# Altium PCB PCB_V1_Controla.PcbDoc
Units mm, origin at the board's own origin, x right, y up, seen from the top; angles counter-clockwise.
Board outline 98 x 133 mm, 2 copper layers (L1, L2), stack 0.221 mm thick; 22 components, 26 nets, 113 pads, 0 vias.
Unrouted connection lines stored in the file: 1.
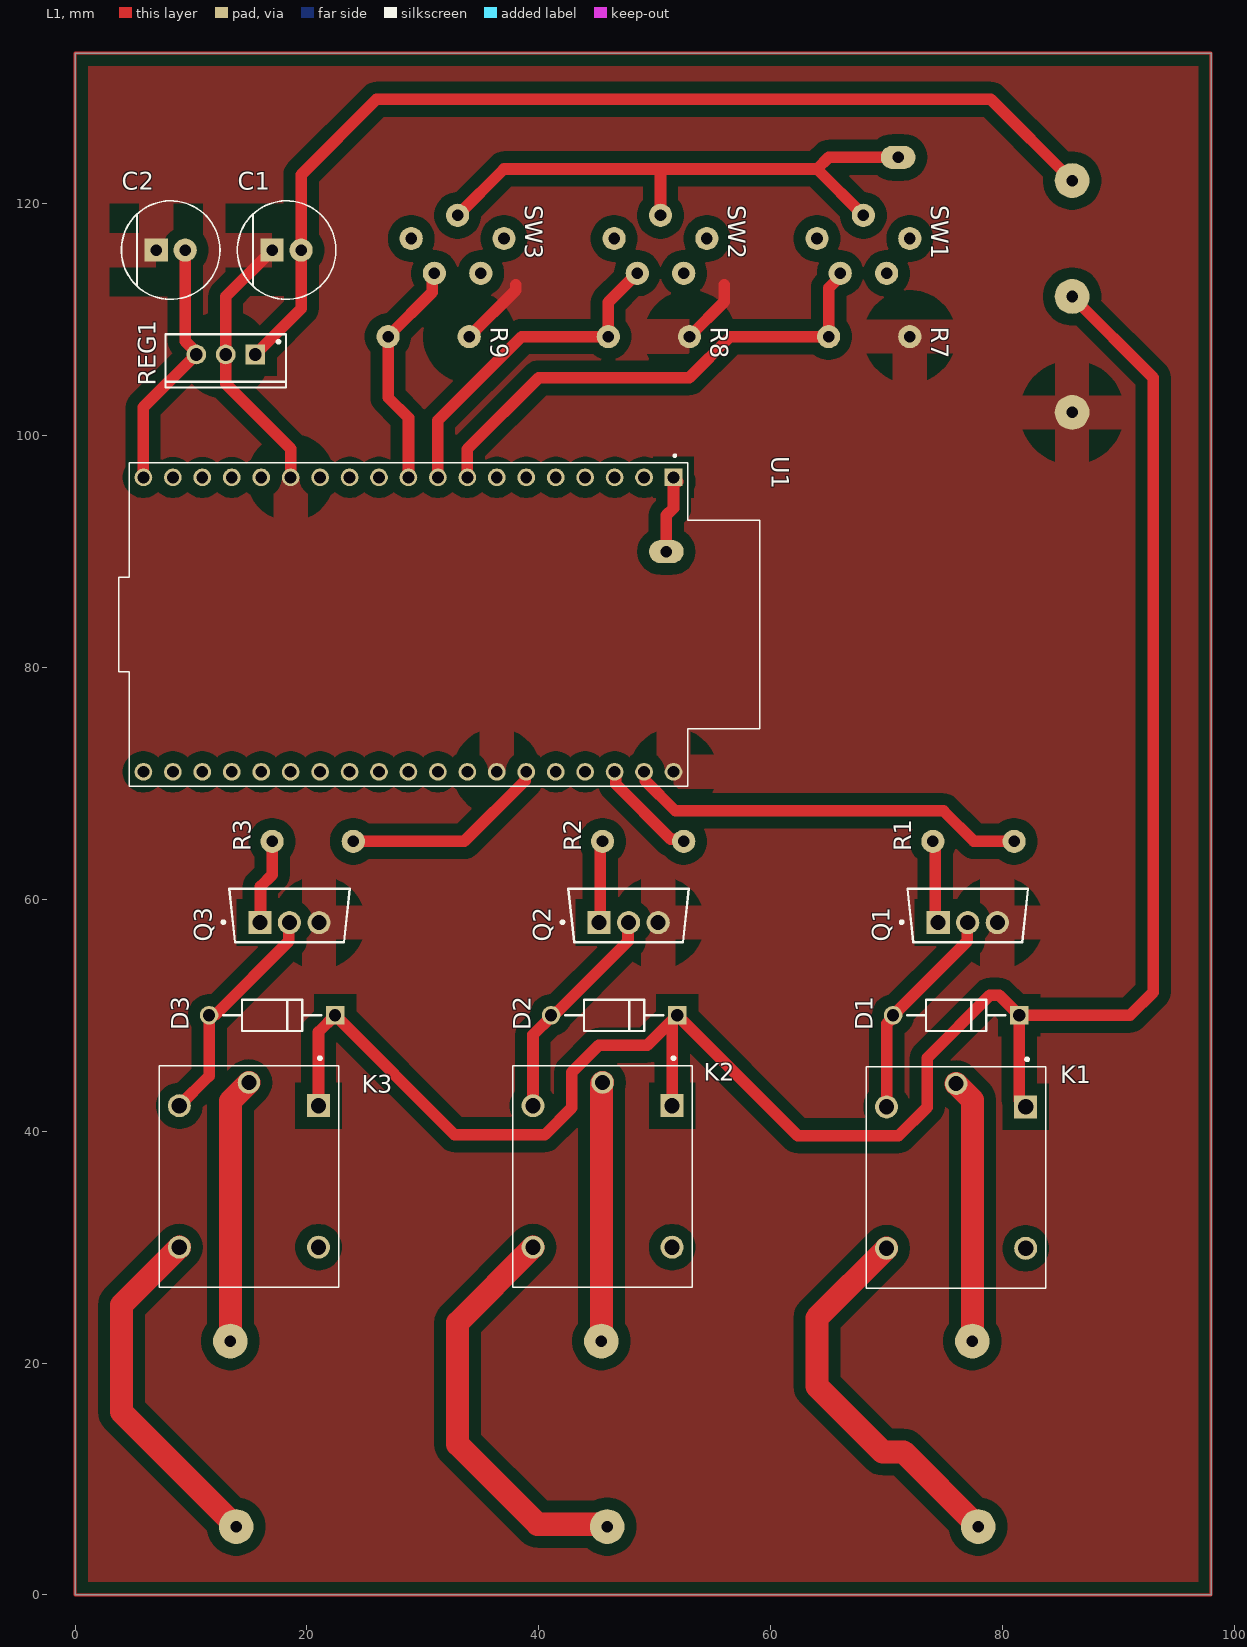
[diagram p0: L1 view]
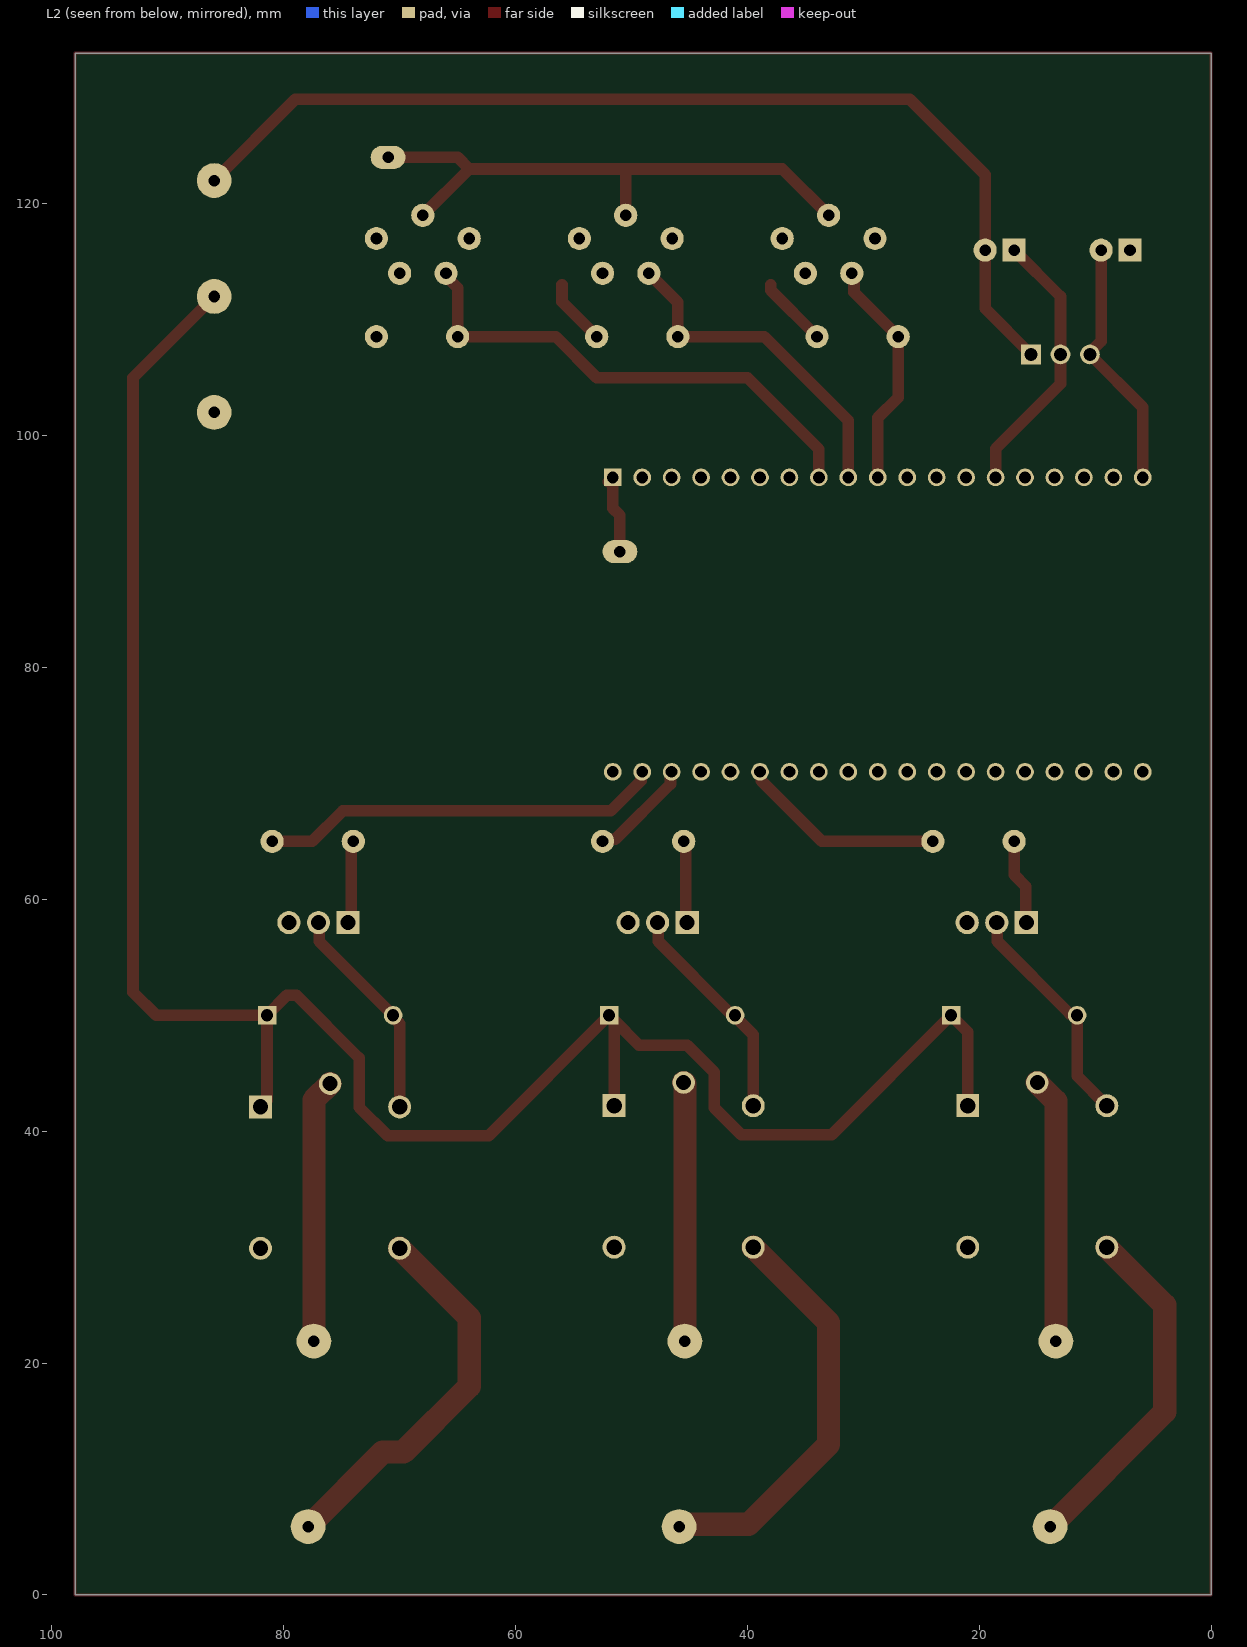
[diagram p1: L2 view, seen from below]
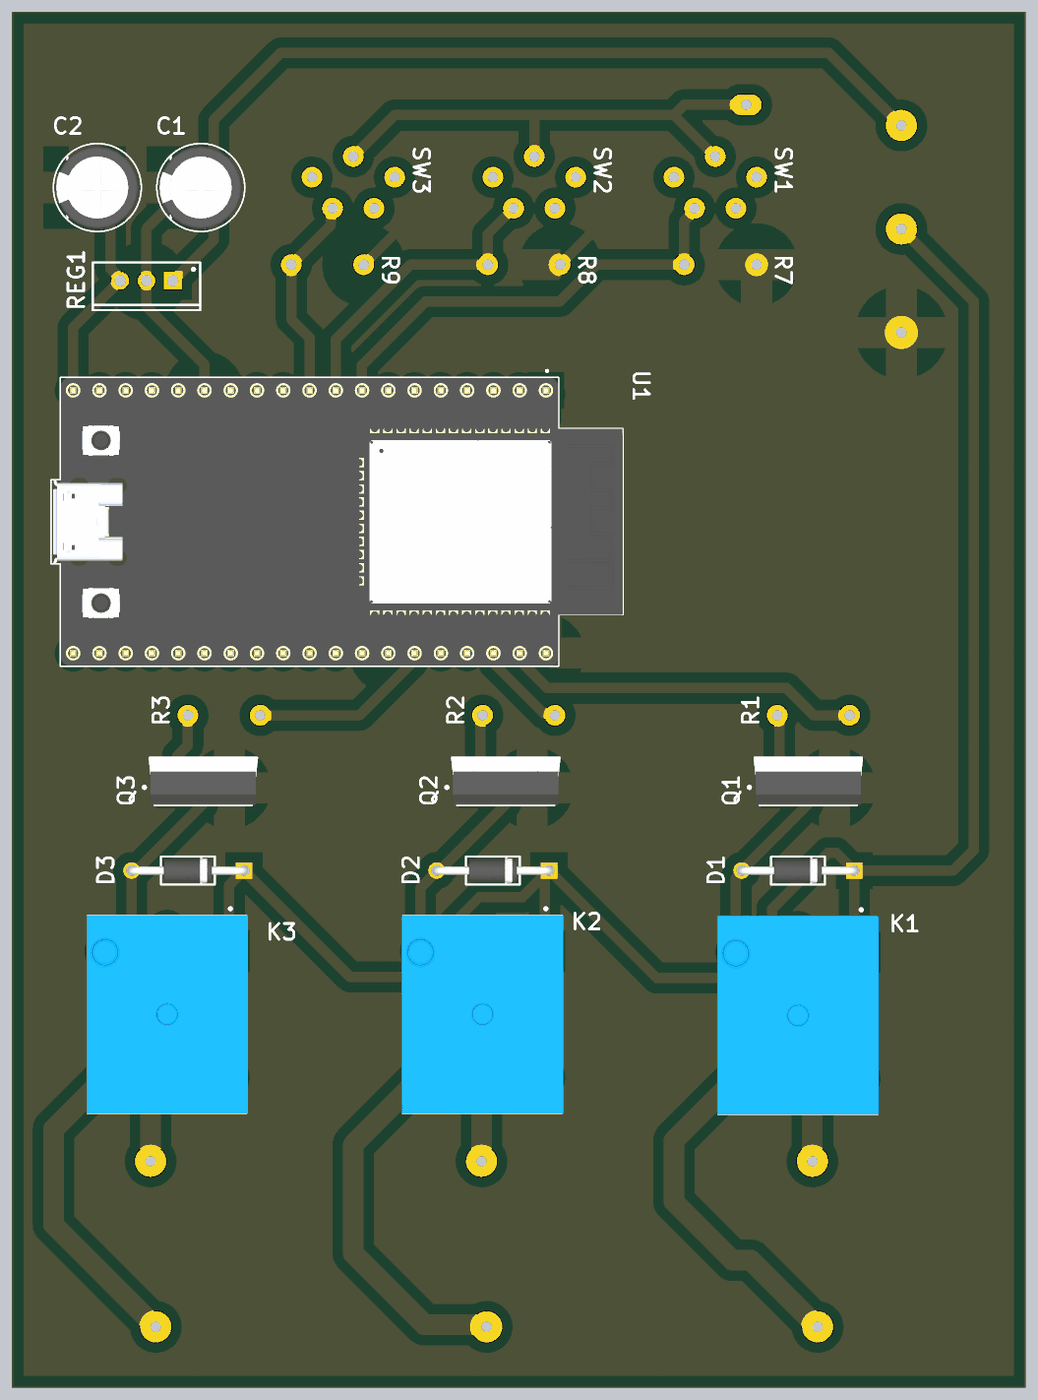
[diagram p2: 3D render of the assembled board from above, using the file's embedded part models]

## Layer stack, top to bottom
Top Solder: solder mask 0.0102, Solder Resist, Dk 3.5
L1: signal copper 0.0356
Dielectric 1: dielectric 0.15, FR-4, Dk 4.8
L2: signal copper 0.0356
Bottom Solder: solder mask 0.0102, Solder Resist, Dk 3.5

## Board outline
0,0 0,133 98,133 98,0

## Design rules (kind name [scope] priority, off if disabled: settings)
Clearance [All] p1: gap=1 ignorepadtopadclearanceinfootprint=TRUE
PolygonConnect [All] p1: connectstyle=Relief reliefconductorwidth=3 reliefentries=4 polygonreliefangle="90 Angle" airgapwidth=3
RoutingVias [All] p1: holewidth=0.711 width=1.27 viastyle="Through Hole" minholewidth=0.711 minwidth=1.27 maxholewidth=0.711 maxwidth=1.27
SolderMaskExpansion [All] p1: expansion=0.102 istentingtop=FALSE
SupplyNets "Schematic Supply Nets_2" [InNet('+12')] p1: voltage=0.000
SupplyNets "Schematic Supply Nets_1" [InNet('GND')] p2: voltage=0.000
SupplyNets "Schematic Supply Nets" [InNet('SW1')] p3: voltage=0.000
Width [All] p1: maxlimit=3 minlimit=1 preferedwidth=2
30 further rules are at their usual default settings.

## Components (designator, comment, footprint, x,y, rotation, side; value= is the part's Value field where it differs from the comment)
C1 "EEAGA1V470" FP-RAD-TH-D_8_0_5-L_7_1-F-MFG 18.25,116 r0 top
C2 "EEAGA1V470" FP-RAD-TH-D_8_0_5-L_7_1-F-MFG 8.25,116 r0 top
D1 "1N4001-E3/54" FP-1N4001-E3-54-MFG 76,50 r180 top
D2 "1N4001-E3/54" FP-1N4001-E3-54-MFG 46.5,50 r180 top
D3 "1N4001-E3/54" FP-1N4001-E3-54-MFG 17,50 r180 top
K1 "SRD-05VDC-SL-C" RELAY_SRD-05VDC-SL-C 76,36 r270 top
K2 "SRD-05VDC-SL-C" RELAY_SRD-05VDC-SL-C 45.5,36.1 r270 top
K3 "SRD-05VDC-SL-C" RELAY_SRD-05VDC-SL-C 15,36.1 r270 top
Q1 "TIP31C" FP-TO-220-P0A0015988-MFG 77,58.607 r90 top
Q2 "TIP31C" FP-TO-220-P0A0015988-MFG 47.748,58.607 r90 top
Q3 "TIP31C" FP-TO-220-P0A0015988-MFG 18.496,58.607 r90 top
R1 "General 1/4 W Resistor" "Generic 1/4W Metallic Resistor Axial" 81,65 r180 top
R2 "General 1/4 W Resistor" "Generic 1/4W Metallic Resistor Axial" 52.5,65 r180 top
R3 "General 1/4 W Resistor" "Generic 1/4W Metallic Resistor Axial" 24,65 r180 top
R7 "General 1/4 W Resistor" "Generic 1/4W Metallic Resistor Axial" 65,108.543 r0 top
R8 "General 1/4 W Resistor" "Generic 1/4W Metallic Resistor Axial" 46,108.543 r0 top
R9 "General 1/4 W Resistor" "Generic 1/4W Metallic Resistor Axial" 27,108.543 r0 top
REG1 "L7805CV" TO220 13,107 r180 top
SW1 "16mm 5 Pin Momentary Button" "16mm Pushbutton 5 Pins" 68,119 r270 top
SW2 "16mm 5 Pin Momentary Button" "16mm Pushbutton 5 Pins" 50.5,119 r270 top
SW3 "16mm 5 Pin Momentary Button" "16mm Pushbutton 5 Pins" 33,119 r270 top
U1 "ESP32-DEVKITC" MODULE_ESP32-DEVKITC 28.77,83.7 r270 top

## Footprints (in the part's own frame and the unit in brackets; to place one, negate y for a bottom-side part, rotate by r counter-clockwise, add the part's x,y. Pads: shape width x height; smd on the part's side, far side on the other; paste and mask are expansions set on the pad)
"16mm Pushbutton 5 Pins" [mm] "Momentary Button 16mm with indicator LED."
  round 2 hole 1: COM(0,0) LED(2,4) LED(2,-4) NC(5,2) NO(5,-2)
FP-1N4001-E3-54-MFG [mm]
  rect 1.6x1.6 hole 1.05 paste-2539.97 mask+0: 1(-5.438,0)
  round 1.6 hole 1.05 paste-2539.97 mask+0: 2(5.438,0)
  silkscreen extent -4.24,-1.35 4.24,1.35, body extent -6.34,-1.45 6.34,1.45, height 0.25
FP-RAD-TH-D_8_0_5-L_7_1-F-MFG [mm]
  rect 2x2 hole 1 paste-2539.97 mask+0: 1(-1.25,0)
  round 2 hole 1 paste-2539.97 mask+0: 2(1.25,0)
  silkscreen extent -4.25,-4.25 4.25,4.25, body extent -4.35,-4.35 4.35,4.35, height 0.25
FP-TO-220-P0A0015988-MFG [mm]
  rect 2x2 hole 1.3 paste-2539.97 mask+0: 1(-0.607,2.55)
  round 2 hole 1.3 paste-2539.97 mask+0: 2(-0.607,0) 3(-0.607,-2.55)
  silkscreen extent -2.3,-5.2 2.3,5.82, body extent -2.4,-5.3 2.4,5.3, height 0.25
"Generic 1/4W Metallic Resistor Axial" [mm]
  round 2 hole 1: 1(0,0) 2(7,0)
MODULE_ESP32-DEVKITC [mm]
  rect 1.53x1.53 / inner round 1.53 / far side rect 1.53x1.53 hole 1.02: 1(-12.7,22.85)
  round 1.53 hole 1.02: 2(-12.7,20.31) 3(-12.7,17.77) 4(-12.7,15.23) 5(-12.7,12.69) 6(-12.7,10.15) 7(-12.7,7.61) 8(-12.7,5.07) 9(-12.7,2.53) 10(-12.7,-0.01) 11(-12.7,-2.55) 12(-12.7,-5.09) 13(-12.7,-7.63) 14(-12.7,-10.17) 15(-12.7,-12.71) 16(-12.7,-15.25) 17(-12.7,-17.79) 18(-12.7,-20.33) 19(-12.7,-22.87) 20(12.7,-22.87) 21(12.7,-20.33) 22(12.7,-17.79) 23(12.7,-15.25) 24(12.7,-12.71) 25(12.7,-10.17) 26(12.7,-7.63) 27(12.7,-5.09) 28(12.7,-2.55) 29(12.7,-0.01) 30(12.7,2.53) 31(12.7,5.07) 32(12.7,7.61) 33(12.7,10.15) 34(12.7,12.69) 35(12.7,15.23) 36(12.7,17.77) 37(12.7,20.31) 38(12.7,22.85)
  silkscreen extent -14.67,-25 13.95,30.3, body extent -13.97,-24.8 13.97,30.3, height 3.25
RELAY_SRD-05VDC-SL-C [mm]
  rect 1.98x1.98 / inner round 1.98 / far side rect 1.98x1.98 hole 1.32: A1(-6.1,6)
  round 1.98 hole 1.32: A2(-6.1,-6) NC(6.1,6) NO(6.1,-6)
  round 1.935 hole 1.29: COM(-8.1,0)
  silkscreen extent -10.3,-7.75 9.55,7.75, body extent -9.6,-7.8 9.6,7.8, height 15.8
TO220 [mm] "TO, Thru-Hole, Vertical, Heatsink Mounted; 3 In-Line Leads; Pitch 2.54 mm"
  rect 1.7x1.7 hole 1.1: 1(-2.54,0)
  round 1.7 hole 1.1: 2(0,0) 3(2.54,0)
  silkscreen extent -5.2,-1.75 5.2,2.85, body extent -5.25,-1.8 5.25,2.9, height 19.7

## Part data
C1 C2: library part CMP-05427-002179-1, "Aluminum Electrolytic Capacitors (Radial Lead Type) 47uF ±20% 35V", Capacitance=47uF, Case/Package=Radial, Leakage Current=16.5uA, Max Operating Temperature=105°C, Min Operating Temperature=-55°C, Package Quantity=200, Ripple Current=96mA, Tolerance=20%, Voltage=35V, Construction=RADIAL, Contact Plating=Tin, Diameter=8mm, Height=7mm, Height - Seated (Max)=0.276inch, Lead Diameter=0.45mm, Lead Free="Lead Free", Lead Pitch=2.5mm, Lead/Base Style=Straight, Length=7mm, Life (Hours)=1000Hour, Mount="Through Hole", Number of Pins=2, Packaging=Bulk, Radiation Hardening=No, Reach SVHC Compliant=Yes, Ripple Current (AC)=96mA, RoHS Compliant=Yes, Series=GA, Termination=Radial, Voltage Rating=35V, Voltage Rating (DC)=35V
D1 D2 D3: library part CMP-02540-000077-1, "DIODE GEN PURP 50V 1A DO204AL", Average Rectified Current=1A, Capacitance=15pF, Case/Package=DO-204AL, Forward Voltage=1.1V, Max Forward Surge Current (Ifsm)=30A, Max Operating Temperature=150°C, Max Repetitive Reverse Voltage (Vrrm)=50V, Max Reverse Current=5uA, Min Operating Temperature=-50°C, Package Quantity=5500, Peak Non-Repetitive Surge Current=45A, Current=1A, Current Rating=1A, Diameter=2.7mm, Element Configuration=Single, Forward Current=1A, Height=2.7mm, Lead Free="Lead Free", Length=0.204inch, Max Reverse Voltage (DC)=50V, Max Surge Current=30A, Mount="Through Hole", Number of Pins=2, Output Current=1A, Packaging="Tape and Reel", Polarity=Standard, Radiation Hardening=No, Reverse Voltage=50V, RoHS Compliant=Yes, Series=-, Voltage=50V, Voltage Rating (DC)=50V, Width=2.7mm
K1 K2 K3: "5V Trigger Relay Module For Arduino And Raspberry Pi 5V Trigger Relay Module For Arduino And Raspberry Pi", Package="NON STANDARD-5 Songle Relay", Availability="Not in stock", Check_prices=https://www.snapeda.com/parts/SRD-05VDC-SL-C/Songle+Relay/view-part/?ref=eda, MF="Songle Relay", MP=SRD-05VDC-SL-C, Price=None, SnapEDA_Link=https://www.snapeda.com/parts/SRD-05VDC-SL-C/Songle+Relay/view-part/?ref=snap
Q1 Q2 Q3: library part CMP-12195-000001-1, "TRANS NPN 100V 3A TO-220", Collector Base Voltage=100V, Collector Emitter Saturation Voltage=1.2V, Emitter Base Voltage=5V, Manufacturer=STMicroelectronics, Max Collector Current=3A, Max Junction Temp=+150°C, Package=TO-220-P0A0015988, Power Dissipation=2W, Temperature="to +150°C", Automotive=No, Category=Trans, Collector Emitter Voltage=100V, ComponentLink2Description=Datasheet, ComponentLink2URL=https://www.st.com/resource/en/datasheet/tip31c.pdf, Device Class L1="Discrete Semiconductors", Device Class L2=Transistors, Device Class L3=BJTs, Digikey Description="TRANS NPN 100V 3A TO-220", Height=19.68mm, Hfe Max=50, Hfe Min=10, Hfe Testic=3A, Hfe Testvce=4V, Lead Free=Yes, Manufacturer Part Number=TIP31C, Mouser Description="Bipolar Transistors - BJT NPN Gen Pur Power", Number Of Elements=1, Number Of Npn=1, Octopart=https://octopart.com/tip31c-stmicroelectronics-15555, RoHS=TRUE, Standoff Height=3.5mm, Temperature Range High=+150°C
R1 R2 R3 R7 R8 R9: library part CMP-009-00323-1, "1% Tolerance, 0.25W", Design Item ID="General 1/4 W Resistor", Source=Santiagos_Library.SchLib
REG1: library part CMP-0244-00483-1, "Positive Voltage Regulator, 5V, 3-Pin TO-220", ComponentLink1Description="Manufacturer URL", ComponentLink1URL=http://www.st.com, ComponentLink2Description=Datasheet, ComponentLink2URL=http://www.st.com/internet/com/TECHNICAL_RESOURCES/TECHNICAL_LITERATURE/DATASHEET/CD00000444.pdf, ComponentLink3Description="Package Specification", ComponentLink3URL=http://www.st.com/internet/com/TECHNICAL_RESOURCES/TECHNICAL_LITERATURE/PACKAGE_INFORMATION/CD00004649.pdf, DatasheetVersion=16/11/2011, PackageDescription="TO, Thru-Hole, Vertical, Heatsink Mounted; 3 In-Line Leads; Pitch 2.54 mm", PackageReference=TO220, PackageVersion=ver3.0
SW1 SW2 SW3: library part CMP-011-00013-1, "16mm Button with LED indicator.", Design Item ID="16mm 5 Pin Momentary Button", Source=Santiagos_Library.SchLib
U1: "ESP32-WROOM-32UE series Transceiver; 802.11 b/g/n (Wi-Fi, WiFi, WLAN), Bluetooth Â® Smart Ready 4.x Dual Mode Evaluation Board", Package=None, Availability="In Stock", Check_prices=https://www.snapeda.com/parts/ESP32-DEVKITC/Espressif+Systems/view-part/?ref=eda, MF="Espressif Systems", MP=ESP32-DEVKITC, Price=None, Purchase-URL=https://pricing.snapeda.com/search/part/ESP32-DEVKITC/?ref=eda, SnapEDA_Link=https://www.snapeda.com/parts/ESP32-DEVKITC/Espressif+Systems/view-part/?ref=snap

## Free pads (board coordinates)
  oval 3x2 hole 1: 3V3(51,90) 3V3(71,124)
  round 3 hole 1: +12(86,122) COM1(77.398,21.898) COM2(45.398,21.898) COM3(13.398,21.898) GND(86,102) NO1(77.898,5.898) NO2(45.898,5.898) NO3(13.898,5.898) VCC(86,112)

## Nets (pads, with @x,y where several pads share a name; then routed paths per layer and width w, separated by ;. In a path a pad name is that pad's centre, name@x,y a point inside that pad or via, vN(x,y) a via of type N, cw(c..) or ccw(c..) an arc to the next point about the centre after c; other vN are vias at no path point)
3.3V: pad.3V3 SW1.COM SW2.COM SW3.COM U1.1 | length 56.9
  L1 w1: SW3.COM 37,123 50.5,123 ; SW2.COM 50.5,123 ; pad.3V3@51,90 51,93.121 51.62,93.741 U1.1 U1.1@52,96.02 ; SW1.COM 64,123 ; pad.3V3@71,124 65,124 64,123 ; 50.5,123 64,123
+12: C1.2 pad.+12 REG1.1 | length 89.2
  L1 w1: REG1.1 19.5,110.96 C1.2 19.5,122.5 26,129 79,129 pad.+12
BOT1: R7.1 SW1.NO U1.8 | length 43.5
  L1 w1: U1.8 33.84,98.84 40,105 52.993,105 56.536,108.543 R7.1 65,112.729 66,113.729 SW1.NO
BOT2: R8.1 SW2.NO U1.9 | length 29.1
  L1 w1: U1.9 31.3,101.3 38.543,108.543 R8.1 46,111.5 SW2.NO
BOT3: R9.1 SW3.NO U1.10 | length 20
  L1 w1: U1.10 28.76,101.528 27,103.288 R9.1 30.809,112.351 30.809,113.809 SW3.NO
BOT4: U1.11
BOT5: U1.12
BOT6: U1.13
COM1: K1.COM pad.COM1 | length 22.8
  L1 w2: K1.COM 77.398,42.702 pad.COM1
COM2: K2.COM pad.COM2 | length 22.3
  L1 w2: pad.COM2 45.398,44.098 K2.COM
COM3: K3.COM pad.COM3 | length 23
  L1 w2: pad.COM3 13.398,42.598 K3.COM
GND: C1.1 C2.1 pad.GND Q1.3 Q2.3 Q3.3 R7.2 R8.2 R9.2 REG1.2 U1.14 U1.32 U1.38 | length 35.4
  L1 w1: C1.1 13,112 REG1.2 13,104.477 18.6,98.877 U1.14 ; R9.2 38,112.543 38,113 ; R8.2 56,111.543 56,113
NetC2_2: C2.2 REG1.3 U1.19 | length 21.9
  L1 w1: U1.19 5.9,102.44 REG1.3 10.46,107.189 9.5,108.149 C2.2
NetQ1_1: Q1.1 R1.2 | length 7.2
  L1 w1: R1.2 74.191,64.809 74.191,58.259 Q1.1
NetQ2_1: Q2.1 R2.2 | length 7.1
  L1 w1: Q2.1 45.198,58.45 45.309,58.561 45.309,64.809 R2.2
NetQ3_1: Q3.1 R3.2 | length 7.4
  L1 w1: Q3.1 15.996,58.05 15.996,61.113 17,62.117 R3.2
NetR1_1: R1.1 U1.37 | length 34.8
  L1 w1: U1.37 49.181,70.899 49.181,70.235 51.79,67.627 74.909,67.627 77.536,65 R1.1
NetR2_1: R2.1 U1.36 | length 9
  L1 w1: U1.36 46.641,70.899 46.641,69.947 51.397,65.191 52.309,65.191 R2.1
NetR3_1: R3.1 U1.33 | length 17.8
  L1 w1: R3.1 33.583,65 38.819,70.235 38.819,70.899 U1.33
NO1: K1.NO pad.NO1 | length 33.3
  L1 w2: K1.NO 64,23.9 64,18 69.668,12.332 71.465,12.332 pad.NO1
NO2: K2.NO pad.NO2 | length 35.5
  L1 w2: K2.NO 33,23.5 33,13 39.898,6.102 45.695,6.102 pad.NO2
NO3: K3.NO pad.NO3 | length 30.3
  L1 w2: K3.NO 4,25 4,15.797 pad.NO3
SW1: D1.1 D2.1 D3.1 K1.A1 K2.A1 K3.A1 pad.VCC | length 181
  L1 w1: K3.A1 21,48.562 D3.1 32.728,39.71 40.531,39.71 42.856,42.035 42.856,45.092 45.181,47.417 49.355,47.417 D2.1@51.5,49.562 ; K2.A1 D2.1@51.5,49.562 ; K1.A1 81.438,42.662 D1.1 ; pad.VCC 93,105 93,52 91,50 D1.1 ; D2.1@51.5,49.562 D2.1 62.328,39.61 71.031,39.61 73.5,42.079 73.5,46.319 78.895,51.714 79.724,51.714 D1.1
SW1_GND: D1.2 K1.A2 Q1.2 | length 18.8
  L1 w1: K1.A2 70,49.276 70.562,49.838 D1.2 70.571,50 76.95,56.379 76.95,57.95 Q1.2
SW2_GND: D2.2 K2.A2 Q2.2 | length 19.4
  L1 w1: K2.A2 39.5,48.309 41.062,49.871 D2.2 41.177,50.115 41.434,50.115 47.698,56.379 47.698,57.95 Q2.2
SW3_GND: D3.2 K3.A2 Q3.2 | length 19.4
  L1 w1: K3.A2 11.562,44.762 D3.2 ; D3.2@12.182,50.115 18.446,56.379 18.446,57.95 Q3.2
pads on no net: K1.NC K2.NC K3.NC SW1.LED SW1.NC SW2.LED SW2.NC SW3.LED SW3.NC U1.2 U1.3 U1.4 U1.5 U1.6 U1.7 U1.15 U1.16 U1.17 U1.18 U1.20 U1.21 U1.22 U1.23 U1.24 U1.25 U1.26 U1.27 U1.28 U1.29 U1.30 U1.31 U1.34 U1.35
copper on no net: | length 462
  L1 w0.254: 0,0 98,0 98,133 0,133 0,0

## Polygon pours and split planes (outlines as drawn)
GND on L1 "NONET_L01_P-001" (solid, pour order 0): 0,133 98,133 98,0 0,0